# Altium PCB PCB3.PcbDoc
Units mil, origin at the board's own origin, x right, y up, seen from the top; angles counter-clockwise.
Board outline 2965.03 x 1980.03 mil, 4 copper layers (Top Layer, AGND1, AGND2, Bottom Layer), stack 23.756 mil thick; 79 components, 31 nets, 195 pads, 60 vias.
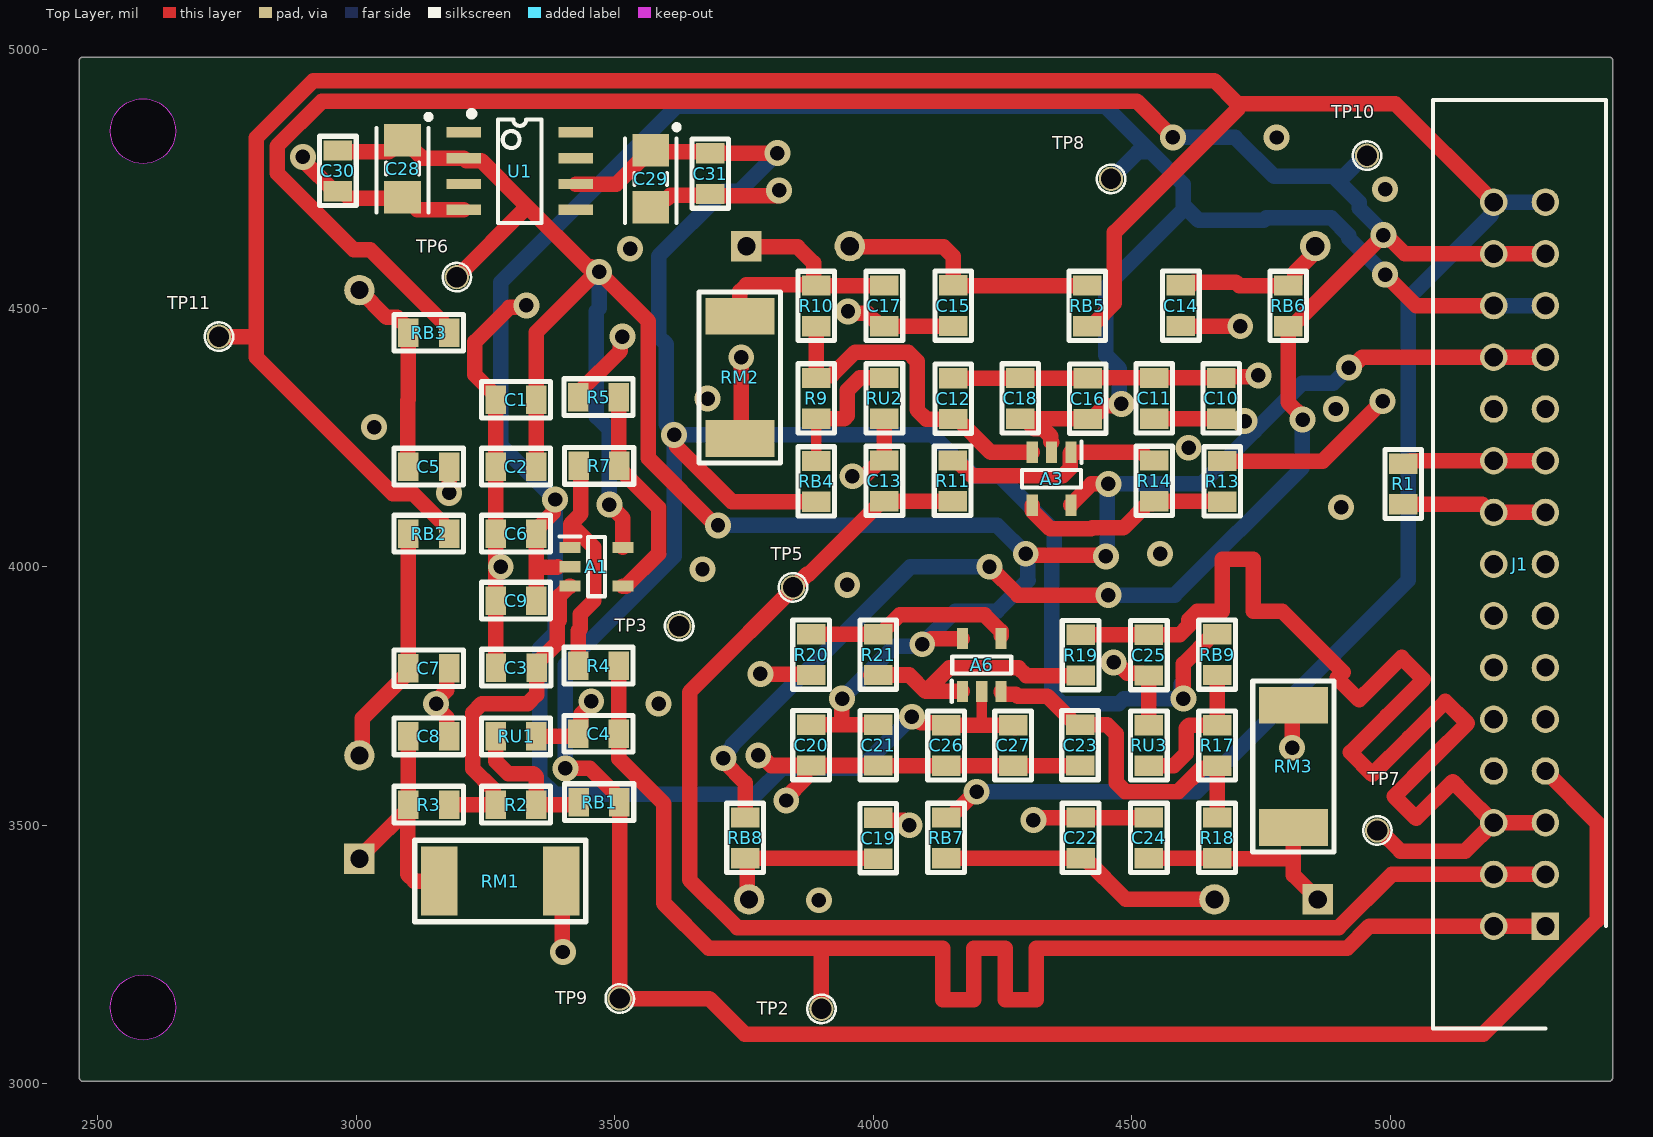
[diagram p0: Top Layer view]
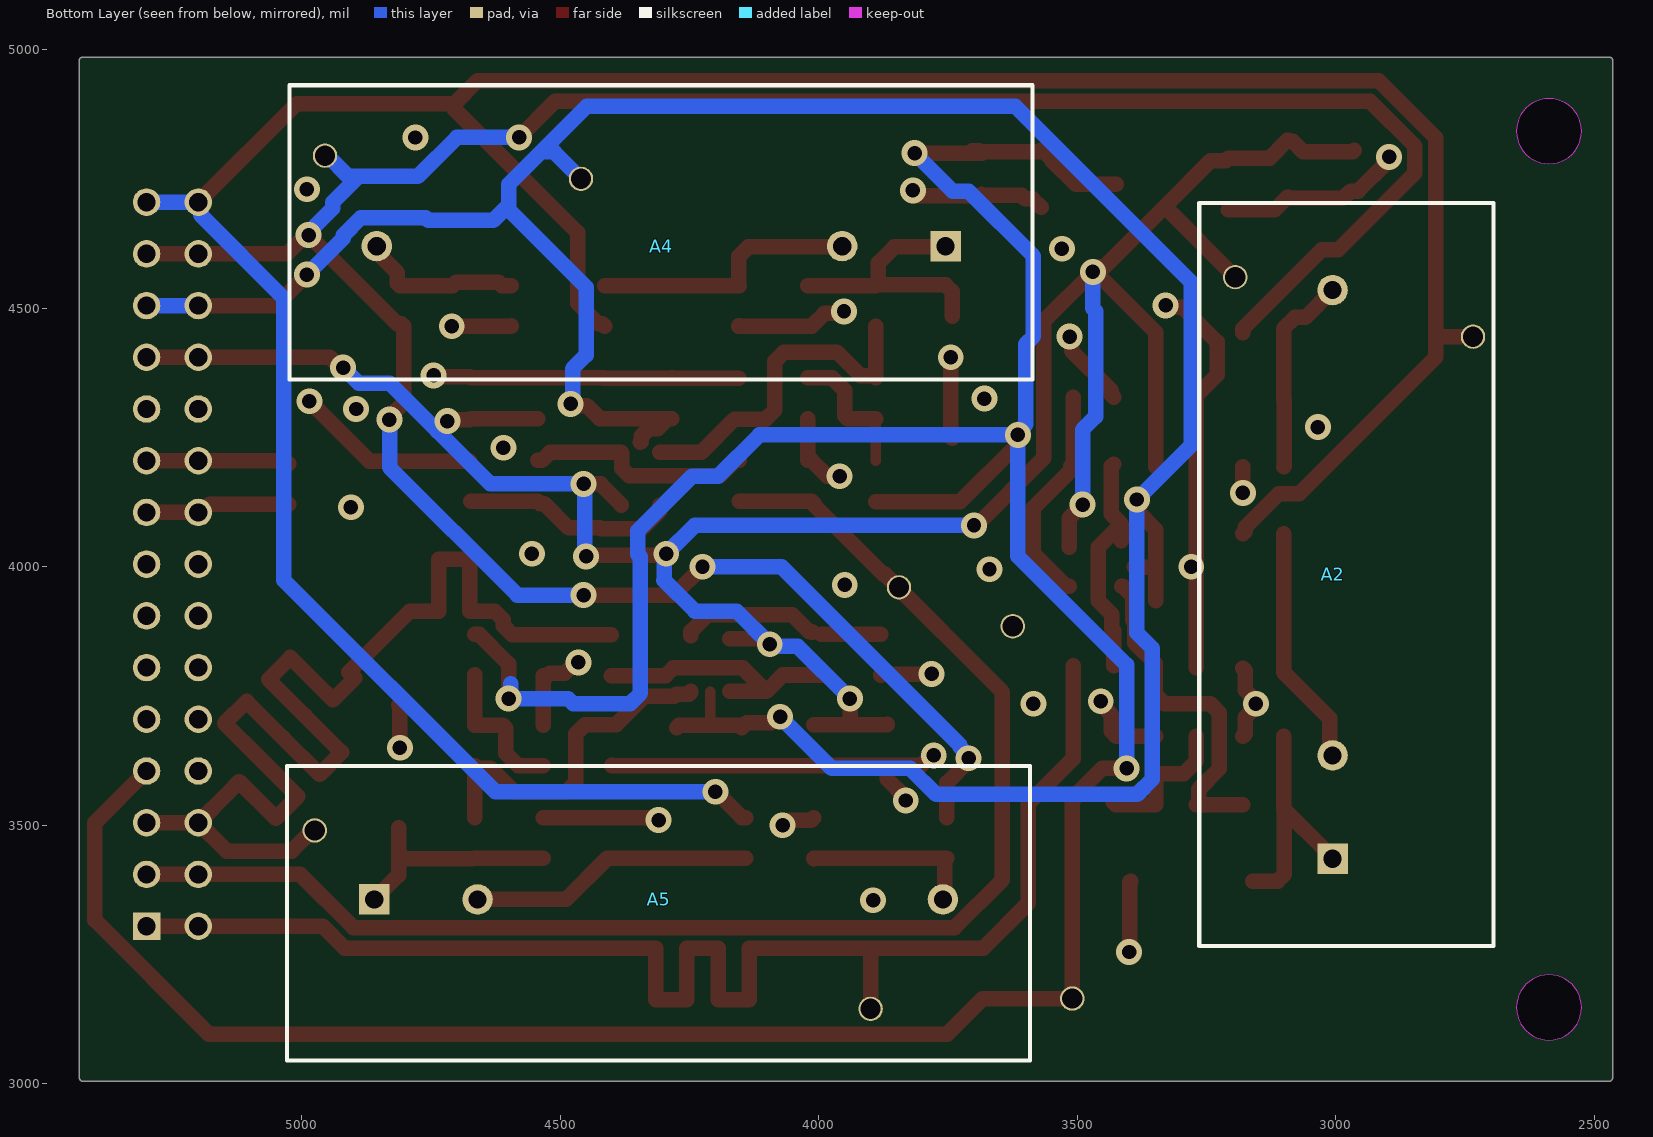
[diagram p1: Bottom Layer view, seen from below]
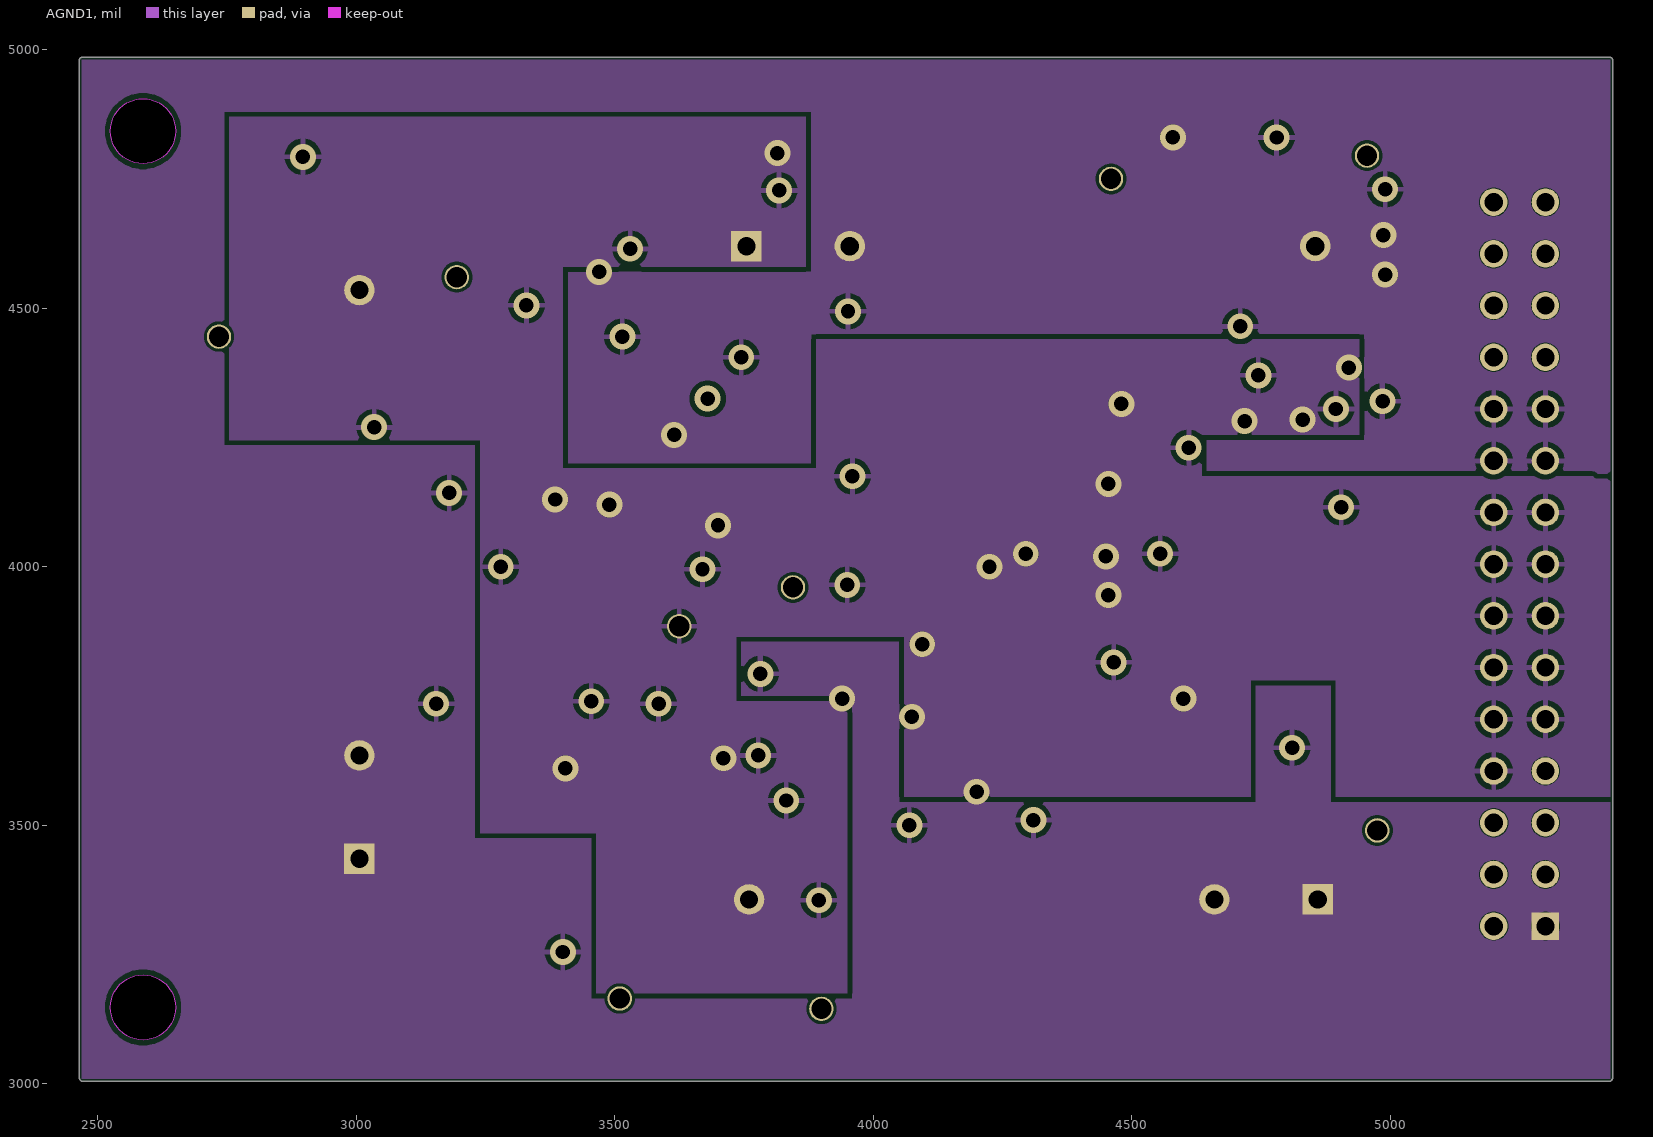
[diagram p2: AGND1]
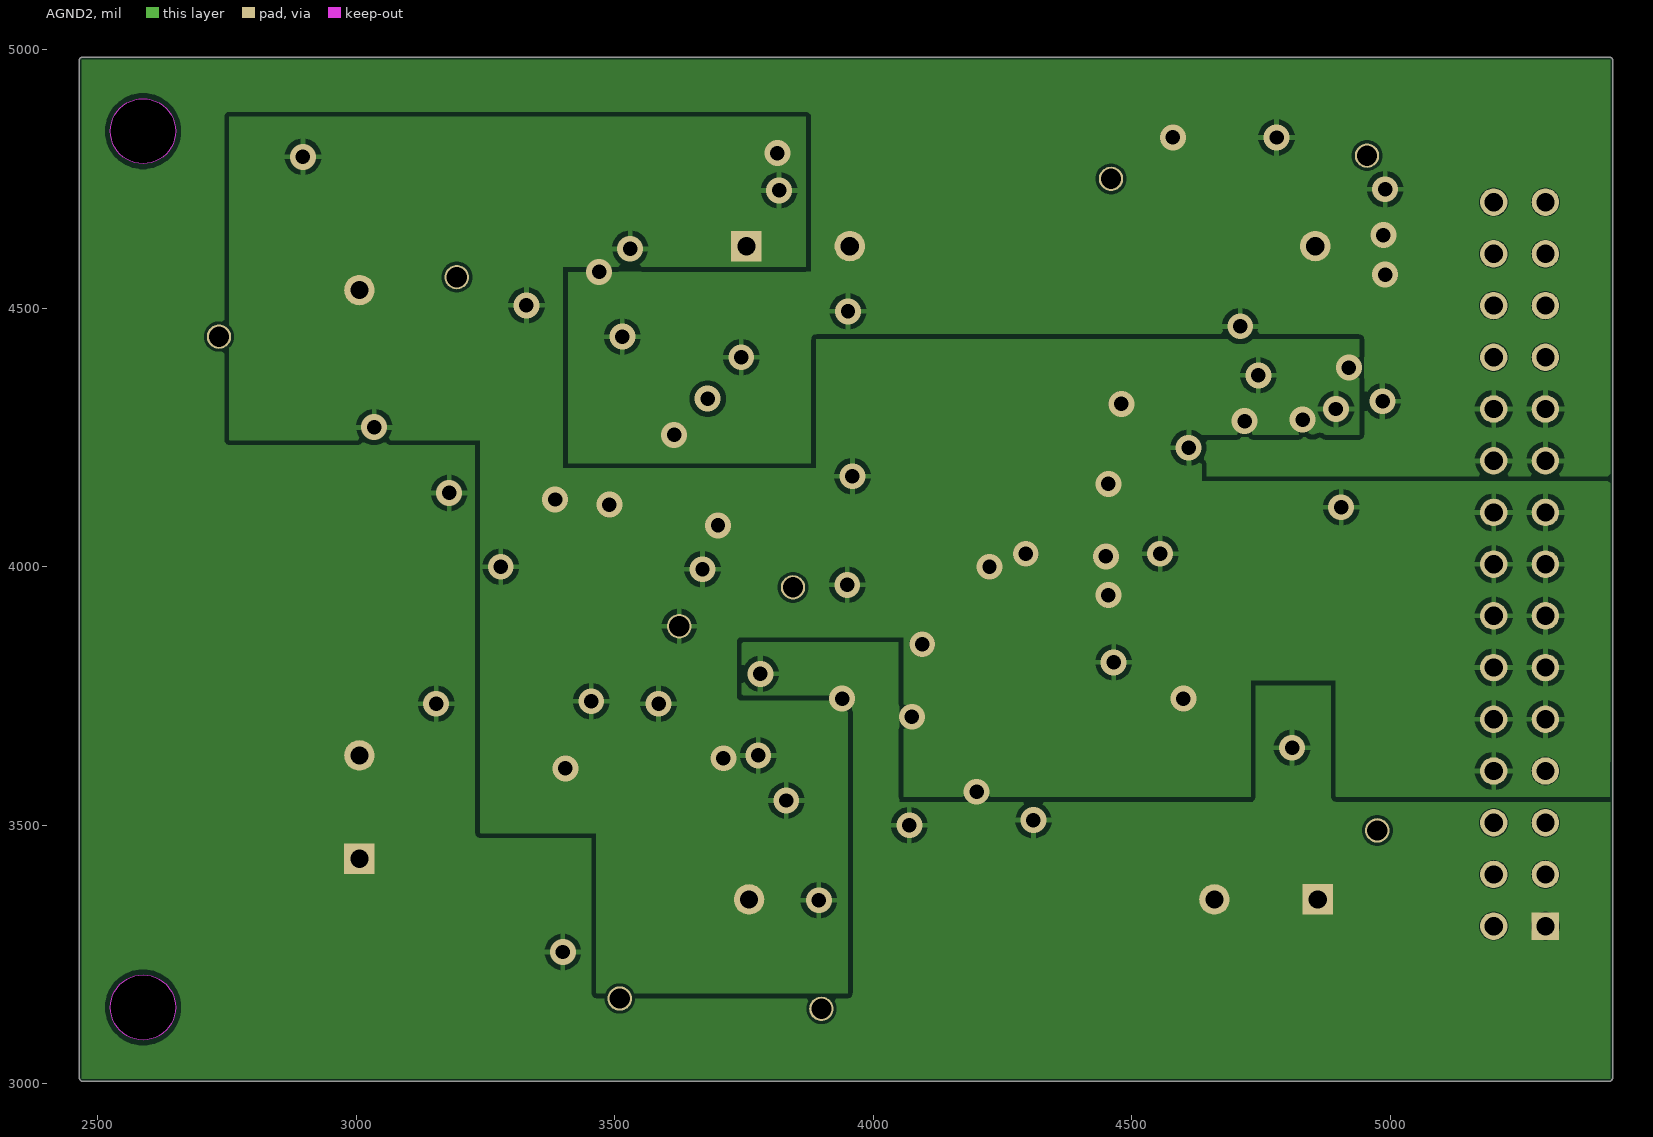
[diagram p3: AGND2]

## Layer stack, top to bottom
Top Solder: solder mask 0.4, Solder Resist, Dk 3.5
Top Layer: signal copper 1.4
Dielectric 2: prepreg 2.8, PP-006, Dk 4.1
AGND1: signal copper 1.378
Dielectric 1: dielectric 12.6, FR-4, Dk 4.8
AGND2: signal copper 1.378
Dielectric 3: prepreg 2.8, PP-006, Dk 4.1
Bottom Layer: signal copper 1.4
Bottom Solder: solder mask 0.4, Solder Resist, Dk 3.5

## Board outline
2467.14,3007.14 cw(c2470,3011.26) 2464.99,3011.26 2464.99,4980 cw(c2470,4980) 2470,4985.02 5422.76,4985.02 cw(c5422.76,4980) 5423.88,4984.89 cw(c5425,4980) 5430.02,4980 5430.02,3011.5 cw(c5425,3011.5) 5428.63,3008.04 cw(c5424.02,3010) 5424.02,3004.99 2471.26,3004.99 cw(c2471.26,3010)
cut-out: 2588.11,4779.21 cw(c2588.11,4842.2) 2525.12,4842.2 cw(c2588.11,4842.2) 2588.11,4905.2 cw(c2588.11,4842.2) 2651.1,4842.2 cw(c2588.11,4842.2)
cut-out: 2588.11,3084.8 cw(c2588.11,3147.8) 2525.12,3147.8 cw(c2588.11,3147.8) 2588.11,3210.79 cw(c2588.11,3147.8) 2651.1,3147.8 cw(c2588.11,3147.8)

## Design rules (kind name [scope] priority, off if disabled: settings)
Clearance [All] p1: gap=10 ignorepadtopadclearanceinfootprint=FALSE except(0: Arc-Hole Track-Hole SMDPad-Hole THPad-Hole Via-Hole Fill-Hole Poly-Hole Region-Hole Text-Hole)
MinimumSolderMaskSliver [All] p1: minsoldermaskwidth=1
PolygonConnect [All] p1: connectstyle=Relief reliefconductorwidth=10 reliefentries=4 polygonreliefangle="90 Angle" airgapwidth=10
RoutingVias [All] p1: holewidth=28 width=50 viastyle="Through Hole" minholewidth=28 minwidth=50 maxholewidth=28 maxwidth=50
SilkToSilkClearance [All] p1: silktosilkclearance=1
SilkToSolderMaskClearance [IsPad] p1: minsilkscreentomaskgap=1 clearancetoexposedcopper=TRUE
SolderMaskExpansion [All] p1: expansion=4 istentingtop=FALSE
Width [All] p1: maxlimit=100 minlimit=10 preferedwidth=10 midlayer1_maxwidth=10 midlayer2_maxwidth=10 minimp=50.000000 maximp=50.000000 favimp=50.000000
27 further rules are at their usual default settings.

## Components (designator, comment, footprint, x,y, rotation, side; value= is the part's Value field where it differs from the comment)
A1 "LTC6240HV" SOT95P280X100-5N 3465,4000 r0 top
A2 "LA55-P" XDCR_LA55-P 2980,3985 r90 bottom
A3 "LTC6240HV" SOT95P280X100-5N 4345,4170 r270 top
A4 "LA55-P" XDCR_LA55-P 4305,4646.57 r0 bottom
A5 "LA55-P" XDCR_LA55-P 4310,3330 r180 bottom
A6 "LTC6240HV" SOT95P280X100-5N 4210,3810 r90 top
C1 "105" 0805 3309.37,4323.02 r0 top value=101
C2 "103" 0805 3309.37,4193.52 r0 top value=101
C3 "101" 0805 3310,3805 r180 top
C4 "103" 0805 3468.92,3676.88 r0 top value=101
C5 "47nf" 0805 3140.63,4193.52 r180 top
C6 "103" 0805 3309.37,4064.01 r0 top value=101
C7 "47nf" 0805 3140.63,3803.75 r0 top
C8 "4.7uF" 0805 3140.63,3671.88 r0 top
C9 "105" 0805 3309.37,3934.51 r0 top value=101
C10 "105" 0805 4673.02,4325.63 r270 top value=101
C11 "103" 0805 4543.52,4325.63 r270 top value=101
C12 "101" 0805 4155,4325 r90 top
C13 "103" 0805 4021.88,4166.08 r270 top value=101
C14 "47nf" 0805 4595,4505 r90 top
C15 "47nf" 0805 4155,4505 r270 top
C16 "103" 0805 4415,4325 r270 top value=101
C17 "4.7uF" 0805 4021.88,4504.37 r270 top
C18 "105" 0805 4284.51,4325.63 r270 top value=101
C19 "47nf" 0805 4010,3475 r270 top
C20 "105" 0805 3880,3655 r90 top value=101
C21 "103" 0805 4010,3655 r90 top value=101
C22 "47nf" 0805 4401.25,3475.63 r90 top
C23 "101" 0805 4400,3655 r270 top
C24 "4.7uF" 0805 4533.12,3475.63 r90 top
C25 "103" 0805 4533.12,3828.92 r90 top value=101
C26 "103" 0805 4140.99,3654.37 r90 top value=101
C27 "105" 0805 4270.49,3654.37 r90 top value=101
C28 "106 25V" "1206 (钽电容)" 3090,4825 r270 top value=100pF
C29 "106 25V" "1206 (钽电容)" 3570,4805 r270 top value=100pF
C30 "104" 0805 2965,4765.63 r90 top
C31 "104" 0805 3685,4760 r90 top
J1 "HIF3FC-30PA-2.54DSA" SHDR30W50P254_2X15_4560X850X1200P 5300,3305 r90 top
R1 "DNP" 0805 5025,4160 r90 top
R2 "20k" 0805 3309.37,3540 r180 top value=10K
R3 "10k" 0805 3140.63,3540 r0 top value=10K
R4 "470R" 0805 3468.92,3808.75 r180 top
R5 "20k" 0805 3468.92,4328.02 r0 top value=10K
R7 "10k" 0805 3470,4195 r0 top value=10K
R9 "20k" 0805 3890,4325.63 r90 top value=10K
R10 "10k" 0805 3890,4504.37 r270 top value=10K
R11 "470R" 0805 4153.75,4166.08 r90 top
R13 "20k" 0805 4675,4165 r270 top value=10K
R14 "10k" 0805 4543.52,4166.08 r270 top value=10K
R17 "20k" 0805 4665,3654.37 r270 top value=10K
R18 "10k" 0805 4665,3475.63 r90 top value=10K
R19 "470R" 0805 4401.25,3828.92 r270 top
R20 "20k" 0805 3880,3830 r90 top value=10K
R21 "10k" 0805 4010,3830 r90 top value=10K
RB1 "0R" 0805 3470,3545 r180 top value=10K
RB2 "0R" 0805 3140.63,4064.01 r0 top value=10K
RB3 "0R" 0805 3140.63,4452.53 r180 top value=10K
RB4 "0R" 0805 3890,4165 r90 top value=10K
RB5 "0R" 0805 4414.01,4504.37 r270 top value=10K
RB6 "0R" 0805 4802.53,4504.37 r90 top value=10K
RB7 "0R" 0805 4140.99,3475.63 r90 top value=10K
RB8 "0R" 0805 3752.47,3475.63 r270 top value=10K
RB9 "0R" 0805 4665,3830 r270 top value=10K
RM1 "24R 1%精度" 2512 3275,3405 r0 top value=3.3K
RM2 "24R 1%精度" 2512 3755,4370 r270 top value=3.3K
RM3 "24R 1%精度" 2512 4800,3610 r90 top value=3.3K
RU1 "DNP" 0805 3309.37,3671.88 r0 top value=10K
RU2 "DNP" 0805 4021.88,4325.63 r270 top value=10K
RU3 "DNP" 0805 4533.12,3654.37 r90 top value=10K
TP2 "TP-黄色测试点" TESTPOINT-TH_BD1.0 3900,3145 r90 top
TP3 "TP-黄色测试点" TESTPOINT-TH_BD1.0 3625,3885 r90 top
TP5 "TP-黄色测试点" TESTPOINT-TH_BD1.0 3845,3960 r90 top
TP6 "TP-黄色测试点" TESTPOINT-TH_BD1.0 3195,4560 r90 top
TP7 "TP-黄色测试点" TESTPOINT-TH_BD1.0 4975,3490 r90 top
TP8 "TP-黄色测试点" TESTPOINT-TH_BD1.0 4460,4750 r90 top
TP9 "TP-黄色测试点" TESTPOINT-TH_BD1.0 3510,3165 r90 top
TP10 "TP-黄色测试点" TESTPOINT-TH_BD1.0 4955,4795 r90 top
TP11 "TP-黄色测试点" TESTPOINT-TH_BD1.0 2735,4445 r90 top
U1 "ADR423ARZ" SOIC-8 3208.46,4840 r0 top value=Value

## Footprints (in the part's own frame and the unit in brackets; to place one, negate y for a bottom-side part, rotate by r counter-clockwise, add the part's x,y. Pads: shape width x height; smd on the part's side, far side on the other; paste and mask are expansions set on the pad)
0805 [mm]
  rect 1x1.4 smd: 1(-1,0) 2(1,0)
  silkscreen extent -1.7,-0.9 1.7,0.9
"1206 (钽电容)" [mm]
  rect 1.6x1.8 smd: 1(0,0) 2(2.8,0)
  silkscreen extent -1.27,-1.27 3.56,1.4
2512 [mm]
  rect 1.8x3.4 smd: 1(-2.903,-0.324) 2(3.097,-0.324)
  silkscreen extent -4.1,-2.32 4.3,1.68
SHDR30W50P254_2X15_4560X850X1200P [mm]
  rect 1.35x1.35 hole 0.9: 1(0,0)
  round 1.35 hole 0.9: 2(0,2.54) 3(2.54,0) 4(2.54,2.54) 5(5.08,0) 6(5.08,2.54) 7(7.62,0) 8(7.62,2.54) 9(10.16,0) 10(10.16,2.54) 11(12.7,0) 12(12.7,2.54) 13(15.24,0) 14(15.24,2.54) 15(17.78,0) 16(17.78,2.54) 17(20.32,0) 18(20.32,2.54) 19(22.86,0) 20(22.86,2.54) 21(25.4,0) 22(25.4,2.54) 23(27.94,0) 24(27.94,2.54) 25(30.48,0) 26(30.48,2.54) 27(33.02,0) 28(33.02,2.54) 29(35.56,0) 30(35.56,2.54)
  silkscreen extent -5.02,-2.98 40.58,5.52, body extent -5.02,-2.98 40.58,5.52, height 12
SOIC-8 [mm]
  rect 1.7x0.51 smd: 1(0,0) 2(0,-1.27) 3(0,-2.54) 4(0,-3.81) 5(5.5,-3.81) 6(5.5,-2.54) 7(5.5,-1.27) 8(5.5,0)
  silkscreen extent 0.35,-4.44 3.82,0.94
SOT95P280X100-5N [mm]
  rect 1.05x0.55 smd: 1(-1.3,0.95) 2(-1.3,0) 3(-1.3,-0.95) 4(1.3,-0.95) 5(1.3,0.95)
  silkscreen extent -1.83,-1.45 0.43,1.48, body extent -1.4,-1.45 1.4,1.45, height 1
TESTPOINT-TH_BD1.0 [mm]
  round 1.2 hole 1 paste+0 mask+0.05: 1(0,0)
  silkscreen extent -0.7,-0.7 0.7,0.7
XDCR_LA55-P [mm]
  rect 1.5x1.5 hole 0.9: 1(-13.97,0.675)
  round 1.5 hole 0.9: 2(-8.89,0.675) 3(13.97,0.675)
  silkscreen extent -18.25,-7.22 18.25,7.22

## Part data
A1 A3 A6: library part AO_LTC6240HV, "OP AMP, +-5.5V, 18MHZ, 10V/US, 5TSOT23", Package=sot23-5, Classe=IC, Codice produttore=LTC6240HVHS5#PBF, Farnell #=2294747, Produttore="LINEAR TECHNOLOGY"
A2 A4 A5: "Current Sensor 50A 1 Channel Hall Effect, Closed Loop Bidirectional Module, Single Pass Through", Package="Module LEM USA", Availability=Unavailable, MF="LEM USA", MP="LA 55-P", Price=None, SnapEDA_Link=https://www.snapeda.com/parts/LA%2055-P/LEM%20USA%20Inc./view-part/38924/?ref=snap
C1 C2 C3 C4 C6 C9 C10 C11 C12 C13 C16 C18 C20 C21 C23 C25 C26 C27: library part Cap, "Capacitor", LatestRevisionDate=17-Jul-2002, LatestRevisionNote="Re-released for DXP Platform.", PackageReference=RAD-0.3, Published=8-Jun-2000, Publisher="Altium Limited"
C5 C7 C8 C14 C15 C17 C19 C22 C24 C30 C31: library part "Cap Semi", "Capacitor (Semiconductor SIM Model)", LatestRevisionDate=17-Jul-2002, LatestRevisionNote="Re-released for DXP Platform.", PackageReference=C1206, Published=8-Jun-2000, Publisher="Altium Limited"
  C30 C31: ClassName=Power
C28 C29: library part "Cap Pol3", "Polarized Capacitor (Surface Mount)", ClassName=Power, LatestRevisionDate=29-May-2009, LatestRevisionNote="IPC-7351 Footprint Added.", PackageDescription="Chip Capacitor", PackageReference=C0805, Published=8-Jun-2000, Publisher="Altium Limited"
J1: "Connector", Manufacturer_Name=Hirose, Manufacturer_Part_Number=HIF3FC-30PA-2.54DSA(71), Mouser Part Number=798-HIF3FC30PA254D71, Datasheet Link=https://datasheet.datasheetarchive.com/originals/distributors/SFDatasheet-7/sf-000141320.pdf, Height=12mm, Mouser Price/Stock=https://www.mouser.co.uk/ProductDetail/Hirose-Connector/HIF3FC-30PA-254DSA71?qs=eDUdFcBPps32%2FyAdBVx6ww%3D%3D
R1 R2 R3 R4 R5 R7 R9 R10 R11 R13 R14 R17 R18 R19 R20 R21 RB1 RB2 RB3 RB4 RB5 RB6 RB7 RB8 RB9 RM1 RM2 RM3 RU1 RU2 RU3: library part Res2, "Resistor", LatestRevisionDate=17-Jul-2002, LatestRevisionNote="Re-released for DXP Platform.", PackageReference=AXIAL-0.4, Published=8-Jun-2000, Publisher="Altium Limited"
  RM1 RM2 RM3: PackageDescription="Axial Device, Thru-Hole; 2 Leads; 0.4 in Pin Spacing"
TP2 TP3 TP5 TP6 TP7 TP8 TP9 TP10 TP11: JLCPCB Part Class="Extended Part", Add into BOM=yes, Convert to PCB=yes, Datasheet=https://atta.szlcsc.comnull, Device=TP-黄色测试点, LCSC Part Name=TP-黄色测试点, Manufacturer Part=TP-黄色测试点, Name=TP-黄色测试点, Supplier=LCSC, Supplier Footprint=TESTPOINT-TH_BD-2P-P2.00, Supplier Part=C9900007422, Symbol=TP-黄色测试点
U1: "Imported", ClassName=Power, Manufacturer_Part_Number=ADR423ARZ, RefDes=Refdes, Type=Type, Vendor=Vendor

## Via types
v1: diameter 50, hole 28, Top Layer to Bottom Layer, 60 vias

## Nets (pads, with @x,y where several pads share a name; then routed paths per layer and width w, separated by ;. In a path a pad name is that pad's centre, name@x,y a point inside that pad or via, vN(x,y) a via of type N, cw(c..) or ccw(c..) an arc to the next point about the centre after c; other vN are vias at no path point)
12VGND: C5.1 C7.2 C8.2 C14.1 C15.2 C17.2 C19.1 C22.2 C24.2 J1.19 J1.20 J1.21 J1.22 R1.2 R5.1 R13.1 R20.1 RM1.2 RM2.2 RM3.2 | length 2091.7
  Top Layer w30: C8.2 3175.31,3676.56 3175.31,3709.27 3155,3729.59 3155,3740.41 3175.31,3760.73 3175.31,3799.06 C7.2 ; v1(3180,4142.6) C5.1 ; RM1.2 3398.46,3390.72 3398.46,3256.54 v1(3400,3255) ; R5.1 3434.24,4332.71 3434.24,4340.58 3511.17,4417.52 3511.17,4441.17 v1(3515,4445) ; RM2.2 3745,4250.83 v1(3745,4405) ; v1(3782.14,3792.86) 3783.26,3791.74 3878.89,3791.74 R20.1 ; v1(3951.37,4493.74) 3955.19,4489.91 3989.09,4489.91 4014,4465 C17.2 4022.19,4465.31 4154.69,4465.31 C15.2 ; C19.1 4014.69,3509.68 4060.32,3509.68 v1(4070,3500) ; v1(4310,3510) 4315.41,3510 4320.41,3515 C24.2 ; C14.1 4595.31,4465.31 4709.69,4465.31 v1(4710,4465) ; R13.1 4869.37,4204.37 v1(4985,4320) ; v1(4810,3650) 4810,3729.17 RM3.2 ; R1.2 5032.87,4199.37 5038.5,4205 J1.20 J1.19
  other v1: 3155,3735 4990,4730 4780,4830
+12: J1.27 J1.28 RB3.1 RB6.1 RB8.1 TP10.1 | length 5296.4
  Top Layer w30: RB3.1 3180,4460.4 3027.24,4613.16 2995.5,4613.16 2847.43,4761.23 2847.43,4813.28 2934.14,4900 4510,4900 v1(4579.64,4830.36) ; v1(3710.36,3629.64) 3710.36,3624.23 3752.47,3582.12 RB8.1 ; v1(4225,4000) 4280,3945 v1(4455,3945) ; v1(4830.36,4284.64) 4830.36,4290.06 4802.53,4317.88 RB6.1 4807.21,4469.69 4815.09,4469.69 v1(4986.58,4641.17) 4991.99,4641.17 5028.16,4605 J1.28 J1.27
  Bottom Layer w30: v1(3710.36,3629.64) 3710.36,3635.06 3727.71,3652.41 3727.71,3655.71 4072,4000 v1(4225,4000) ; v1(4455,3945) 4582.9,3945 4830,4192.1 4830,4284.29 v1(4830.36,4284.64) ; v1(4579.64,4830.36) 4699.85,4830.36 4775.21,4755 4890,4755 ; TP10.1 4950.33,4795 4910.33,4755 4890,4755 ; v1(4986.58,4641.17) 4986.58,4646.59 4940.32,4692.84 4940.32,4704.68 4900.17,4744.83 4890,4755
-12: J1.29 J1.30 RB2.2 RB5.2 RB7.2 TP11.1 | length 6089.8
  Top Layer w30: TP11.1 2807.43,4445 ; RB2.2 3175.31,4068.7 3175.31,4076.57 3110.93,4140.96 3071.22,4140.96 2807.43,4404.75 2807.43,4445 ; RB7.2 4148.86,3515 4198.86,3565 v1(4200,3565) ; RB5.2 4418.7,4469.69 4426.57,4469.69 4466.57,4509.69 4466.57,4646.57 4705,4885 4705,4895 ; J1.30 5010,4895 4705,4895 ; 2807.43,4445 2807.43,4829.85 2917.57,4940 4660,4940 4705,4895
  Bottom Layer w30: v1(4200,3565) 4625.71,3565 5035,3974.29 5035,4520 5195.57,4680.57 5195.57,4700.57 J1.30 J1.29
A+5V: A1.5 A3.5 A6.5 C1.2 C2.2 C10.2 C11.2 C20.2 C21.2 C28.1 C30.2 J1.23 J1.24 TP6.1 U1.2 | length 5332
  Top Layer w30: C30.2 2967.67,4802.33 3063.39,4802.33 3083.39,4822.33 C28.1@3090,4822.33 ; C28.1@3092.53,4825 3093.94,4825 3110.43,4808.5 3110.43,4807.57 3128.01,4790 U1.2 3213.43,4785.04 3242.28,4785.04 3326.16,4701.16 ; TP6.1 3326.16,4691.16 3326.16,4701.16 ; C2.2 C1.2 3348.74,4453.74 v1@3465,4570 ; v1(3490,4120) 3516.18,4093.82 A1.5 ; v1(3700,4080) 3695,4080 3565,4210 3565,4475 v1(3470,4570) v1@3465,4570 ; C20.2@3867.44,3695 3868.07,3694.37 C20.2 3939.04,3694.37 ; v1(3940,3745) 3939.04,3744.04 3939.04,3694.37 ; C21.2 3939.04,3694.37 ; v1(4095,3850) 4100.41,3850 4111.59,3861.18 A6.5 ; v1(4295,4025) 4297.5,4022.5 4447.5,4022.5 v1(4450,4020) ; A3.5 4382.4,4120.31 4422.09,4160 v1(4455,4160) ; C11.2 C10.2 ; C10.2@4674.28,4285 4675.37,4283.92 4715.99,4283.92 v1(4718.33,4281.57) ; v1@4920,4379.59 v1(4920,4385) 4925.41,4385 4945.41,4405 J1.24 J1.23 J1.23@5303.24,4401.76 ; 3326.16,4701.16 3447.32,4580 3454.59,4580 3464.59,4570 v1@3465,4570
  Bottom Layer w30: v1(3470,4570) 3470,4499.44 3465,4494.44 3465,4290.21 3490,4265.21 v1(3490,4120) ; v1(3700,4080) 4240,4080 v1(4295,4025) 4298.83,4021.17 4298.83,3975.46 4300,3974.29 4239.77,3914.06 4159.06,3914.06 v1(4095,3850) 4091.17,3846.17 4041.17,3846.17 v1(3940,3745) ; v1(4450,4020) 4452.5,4022.5 4452.5,4157.5 v1(4455,4160) 4635,4160 4737.45,4262.45 ; v1(4718.33,4281.57) 4737.45,4262.45 ; v1(4920,4385) 4890,4355 4830,4355 4737.45,4262.45
A-5V: A1.2 A3.2 A6.2 C6.2 C9.2 C16.2 C18.2 C26.2 C27.2 J1.25 J1.26 TP8.1 | length 5518.6
  Top Layer w20: A6.2 4210,3695.76 4212.02,3693.74
  Top Layer w30: C9.2 3348.74,3999.26 ; v1(3385,4130) 3381.17,4126.17 3381.17,4104.32 3348.74,4071.89 3348.74,3999.26 ; 3390,4000 3389.26,3999.26 3348.74,3999.26 ; v1(4075,3710) 4080.41,3710 4091.99,3698.43 4139.49,3698.43 4148.86,3689.06 4153.55,3693.74 4212.02,3693.74 C27.2 C27.2@4275.18,3689.06 ; C18.2 C18.2@4292.38,4286.26 ; A3.2@4345,4240.35 4343.43,4241.92 4343.43,4252.21 4328.78,4266.85 4311.79,4266.85 C18.2@4292.38,4286.26 ; v1(4480,4315) 4476.17,4311.17 4448.42,4311.17 4423.5,4286.26 C18.2@4292.38,4286.26 ; v1(4990,4565) 5050,4505 J1.26
  Bottom Layer w30: v1(4075,3710) 3975,3610 3823.42,3610 3773.42,3560 3384.29,3560 3355,3589.29 3355,3841.94 3385,3871.94 v1(3385,4130) 3279.64,4235.36 3279.64,4549.64 3620,4890 4449.29,4890 4537.14,4802.14 ; TP8.1 4512.14,4802.14 4537.14,4802.14 ; v1(4480,4315) 4476.17,4318.83 4476.17,4383.12 4450,4409.29 4450,4540.71 4604.29,4695 ; v1@4980,4575 4919.53,4635.47 4919.53,4641.01 4886.01,4674.53 4759.91,4674.53 4755.39,4670 4629.29,4670 4600,4699.29 4600,4739.29 4537.14,4802.14 ; J1.26 J1.25
AGND: C1.1 C2.1 C3.2 C4.1 C6.1 C9.1 C10.1 C11.1 C12.2 C13.1 C16.1 C18.1 C20.1 C21.1 C23.2 C25.1 C26.1 C27.1 C28.2 C29.2 C30.1 C31.1 J1.8 J1.9 J1.10 J1.11 J1.12 J1.13 J1.14 J1.15 J1.16 J1.17 J1.18 R1.1 RU1.2 RU2.2 RU3.2 TP3.1 U1.4 | length 3473.2
  Top Layer w30: v1(2897.43,4792.57) 2901.25,4788.75 2901.25,4782.13 2957.13,4726.26 C30.1 ; C30.1@2971.47,4726.26 2976.15,4721.57 2977.56,4721.57 2987.04,4712.09 C28.2@3090,4712.09 ; C28.2@3092.53,4714.76 3093.94,4714.76 3118.7,4690 U1.4 ; C3.2 3270.32,3805.31 3270.32,3934.19 C9.1 C6.1 C2.1 3270,4330.9 3230,4370.9 3230,4434.92 3296.61,4501.53 3325.82,4501.53 v1(3329.64,4505.36) ; RU1.2 3424.87,3671.88 3429.55,3676.56 C4.1 3434.24,3681.56 3434.24,3713.82 3455,3734.59 v1(3455,3740) ; C29.2 3586.5,4711.26 3601.31,4711.26 3608.01,4717.96 3682.33,4717.96 C31.1 ; C31.1@3685,4719.22 3686.58,4717.64 v1@3818.06,4717.64 ; v1(3777.71,3635) 3783.12,3635 3802.49,3615.63 C20.1 3905.63,3615.63 C21.1 4010.31,3615.32 4140.67,3615.32 C26.1 C27.1 4270.81,3615.32 4399.69,3615.32 C23.2 ; v1(3832.06,3547.94) 3832.06,3553.35 3867.44,3588.73 3867.44,3610.94 C20.1@3886.75,3610.94 ; v1(3960,4175) 3983.55,4175 4014,4205.45 C13.1 RU2.2 ; C12.2 4283.88,4364.37 C18.1 4284.82,4364.69 4414.69,4364.69 C16.1 4415.63,4365 C11.1 C10.1 4675.52,4367.5 4742.5,4367.5 v1(4745,4370) ; v1(4465,3815) 4470.41,3815 4491.18,3794.24 4520.57,3794.24 4525.25,3789.55 C25.1 RU3.2 ; R1.1 5178.11,4120.63 5193.74,4105 J1.18 J1.17
  other v1: 3895,3355 3585,3735 3950,3965 3670,3995 3280,4000 4555,4025 4905,4115 4610,4230 3035,4270 4895,4305 3530,4615 3818.06,4727.64
CSO1: A2.1 C8.1 R3.1 RM1.1 | length 467.9
  Top Layer w30: A2.1 3021.1,3449.53 3021.1,3451.97 R3.1@3100,3530.87 ; C8.1 R3.1 3101.26,3532.13 R3.1@3100,3530.87 ; RM1.1 3112.74,3392.26 3100,3405 R3.1@3100,3530.87
CSO2: A4.1 C17.1 R10.1 RM2.1 | length 505.4
  Top Layer w30: RM2.1 3742.26,4532.26 3755,4545 R10.1@3883.74,4545 ; A4.1@3765,4618.43 3854,4618.43 3885,4587.43 3885,4548.43 3889.69,4543.74 R10.1 C17.1
CSO3: A5.1 C24.1 R18.1 RM3.1 | length 446.2
  Top Layer w10: R18.1 R18.1@4671.26,3430
  Top Layer w30: C24.1 R18.1 ; R18.1@4671.26,3435 4800,3435 4812.74,3447.74 ; RM3.1 4812.74,3447.74 ; A5.1 4812.74,3403.83 4812.74,3447.74
NetA1_1: A1.1 R4.2 R7.1 | length 463.6
  Top Layer w30: 3415,4050 3415,4082.5 ; R4.2 3429.55,3876.15 3433.43,3880.02 3433.43,3907.81 3459.49,3933.87 3459.49,4038.01 3415,4082.5 ; R7.1@3429.55,4198.52 3434.24,4193.83 3434.24,4151.47 3435,4150.71 3435,4102.5 3415,4082.5
NetA1_3: A1.3 C3.1 R2.2 R3.2 | length 662.1
  Top Layer w30: R3.2 R2.2 3265.31,3544.69 3265.31,3569.69 3225.31,3609.69 3225.31,3717.43 3242.89,3735 3331.8,3735 3349.37,3752.57 C3.1 3349.37,3812.87 3389.55,3853.05 3389.55,3892.72 3393.43,3896.59 3393.43,3943.7 3412.32,3962.6 A1.3
NetA1_4: A1.4 R5.2 R7.2 | length 429.4
  Top Layer w30: R5.2 3508.29,4198.52 3512.98,4193.83 3512.98,4185.96 3585,4113.93 3585,4025.17 3522.43,3962.6 A1.4
NetA2_2: A2.2 C7.1 RB2.1 | length 468.2
  Top Layer w30: A2.2 3012.13,3640.56 3012.13,3706.75 3101.26,3795.88 C7.1 3101.26,3934.51 RB2.1
NetA2_3: A2.3 C5.2 RB3.2 | length 393.5
  Top Layer w30: A2.3 3059.27,4482.3 3079.36,4482.3 3101.26,4460.4 RB3.2 3101.26,4323.02 3100,4321.76 3100,4194.78 C5.2
NetA3_1: A3.1 R11.2 R14.1 | length 445.5
  Top Layer w10: R14.1@4543.07,4205 R14.1
  Top Layer w30: R11.2 4161.62,4205.45 4191.56,4175.51 4366.18,4175.51 4380.83,4190.16 4380.83,4219.61 A3.1 4519.91,4221.18 4535.64,4205.45 R14.1
NetA3_3: A3.3 C12.1 R9.2 R10.2 | length 673.8
  Top Layer w30: R10.2 R9.2 3894.69,4369.69 3919.69,4369.69 3965,4415 4067.43,4415 4085,4397.43 4085,4303.2 4102.57,4285.63 C12.1 4162.87,4285.63 4227.32,4221.18 A3.3
NetA3_4: A3.4 R13.2 R14.2 | length 412.8
  Top Layer w30: A3.4 4307.6,4108.11 4342.56,4073.15 4421.65,4073.15 4423.5,4075 4483.93,4075 4530.96,4122.02 4538.83,4122.02 R14.2 R13.2@4673.02,4126.71
NetA4_2: A4.2 C15.1 RB5.1 | length 513.5
  Top Layer w30: A4.2@3965,4618.43 4136.57,4618.43 4155,4600 C15.1 ; C15.1@4153.75,4543.74 4284.51,4543.74 RB5.1
NetA4_3: A4.3 C14.2 RB6.2 | length 317.9
  Top Layer w30: C14.2@4595,4543.74 4613.03,4543.74 4619.29,4550 4701.5,4550 4707.76,4543.74 RB6.2 4810.4,4543.74 4815.09,4548.43 4815.09,4568.51 A4.3@4865,4618.43
NetA5_2: A5.2 C22.1 RB7.1 | length 552
  Top Layer w30: RB7.1 4270.49,3436.26 C22.1 4409.12,3436.26 4488.81,3356.57 A5.2
NetA5_3: A5.3 C19.2 RB8.2 | length 340.6
  Top Layer w30: A5.3 3756.24,3360.34 3756.24,3432.5 RB8.2 3881.98,3436.26 3882.29,3435.94 4009.68,3435.94 C19.2
NetA6_1: A6.1 R19.2 R21.1 | length 515.6
  Top Layer w30: R21.1@3995,3790.63 4069.74,3790.63 4101.56,3758.82 ; A6.1 4101.56,3758.82 ; R19.2 4296.22,3789.55 4281.29,3804.49 4147.22,3804.49 4101.56,3758.82
NetA6_3: A6.3 C23.1 R17.2 R18.2 | length 674.7
  Top Layer w30: A6.3 4247.4,3757.32 4251.57,3753.15 4276.06,3753.15 4279.65,3749.55 4336.94,3749.55 4392.13,3694.37 C23.1 4452.43,3694.37 4470,3676.8 4470,3582.57 4487.57,3565 4590,3565 4635.31,3610.31 4660.31,3610.31 R17.2 R18.2
NetA6_4: A6.4 R20.2 R21.2 | length 386.2
  Top Layer w30: R20.2 R21.2@3995,3869.37 ; R21.2@4011.48,3872.98 4012.56,3874.06 4018.34,3874.06 4051.14,3906.85 4215.4,3906.85 4247.4,3874.85 A6.4@4247.4,3866.85
NetR2_1: R2.1 RB1.2 RU1.1 | length 277.2
  Top Layer w30: RU1.1 3270,3624.14 3294.14,3600 3342.88,3600 3348.74,3594.14 R2.1 3425.94,3540 3430.63,3544.69 RB1.2
NetR9_1: R9.1 RB4.2 RU2.1 | length 274.9
  Top Layer w20: RB4.2 R9.1
  Top Layer w30: R9.1 3944.14,4286.26 3950,4292.12 3950,4340.86 3974.14,4365 RU2.1
NetR17_1: R17.1 RB9.2 RU3.1 | length 289.9
  Top Layer w30: RU3.1 4580.86,3615 4605,3639.14 4605,3687.88 4610.86,3693.74 R17.1 RB9.2
REF_3V: C29.1 C31.2 J1.7 RB1.1 RB4.1 RB9.1 TP9.1 U1.6 | length 6597
  Top Layer w30: v1@3415,3610 3452.24,3610 3509.37,3552.87 RB1.1 3509.68,3544.69 3509.68,3165.32 TP9.1 3683.09,3165 3751.71,3096.38 5179.88,3096.38 5400,3316.5 5400,3505 J1.7 ; U1.6 3503.46,4740 3549.57,4786.1 3549.57,4788.5 3566.06,4805 C29.1 3572.67,4802.33 C31.2@3682.04,4802.33 ; v1(3615,4255) 3618.83,4251.17 3618.83,4233.8 3727,4125.63 RB4.1 ; C31.2@3703.7,4804.06 3689.69,4804.06 C31.2 3814.37,4799.37 v1(3815,4800) ; v1@4600,3755 4600,3812.24 4657.13,3869.37 RB9.1
  Bottom Layer w30: v1(3405,3610) 3405,3810 3615,4020 v1(3615,4255) ; v1(3815,4800) 3740.94,4725.94 3710.23,4725.94 3585,4600.71 3585,4445.56 3600,4430.56 3600,4275.41 3615,4260.41 v1(3615,4255) ; 4596.17,3773.83 4596.17,3748.83 v1(4600,3745) 4484.79,3745 4474.79,3735 4365,3735 4345,3755 4345,4019.29 4350,4024.29 4350,4070 4245,4175 4195,4175 4115,4255 v1(3615,4255)
VSO1: C4.2 J1.1 J1.2 R4.1 TP2.1 | length 2769.4
  Top Layer w30: R4.1 C4.2 3508.29,3628.68 3595,3541.97 3595,3349.29 3682.24,3262.05 3900,3262.05 ; TP2.1 3900,3262.05 ; J1.1 J1.2 4959.4,3305 4916.45,3262.05 4475,3262.05 4315,3262.05 4315,3162.52 4255,3162.52 4255,3262.05 4195,3262.05 4195,3162.52 4135,3162.52 4135,3262.05 4075,3262.05 4045,3262.05 3900,3262.05
VSO2: C13.2 J1.3 J1.4 R11.1 TP5.1 | length 2769.4
  Top Layer w30: 3873.65,3986.35 3645,3757.71 3645,3394.46 3737.41,3302.05 4899.88,3302.05 5002.84,3405 J1.4 J1.3 ; 3875,3985 4009.32,4119.32 4009.32,4122.02 C13.2@4014,4126.71 ; C13.2 C13.2@4014,4126.71 ; R11.1 C13.2@4014,4126.71
VSO3: C25.2 J1.5 J1.6 R19.1 TP7.1 | length 2396.3
  Top Layer w30: R19.1 4401.47,3868.07 4401.7,3868.29 C25.2 4592.43,3868.29 4610,3885.86 4610,3896.97 4627.09,3914.06 4645,3914.06 4675,3914.06 4675,4014.06 4735,4014.06 4735,3914.06 4790.94,3914.06 4845,3860 4866.21,3838.79 4908.64,3796.36 4897.32,3785.04 4939.75,3742.62 4951.07,3753.93 5021.78,3824.64 5064.2,3782.22 4993.49,3711.51 4922.78,3640.8 4965.21,3598.37 5035.92,3669.08 5106.58,3739.74 5149,3697.31 5078.35,3626.65 5007.63,3555.94 5050.06,3513.52 5120.77,3584.23 5142.5,3562.5 J1.6 ; TP7.1 4979.67,3490 5019.67,3450 5145,3450 J1.6 ; J1.5 J1.6
  Bottom Layer w30: J1.6@5193.74,3505 J1.6
pads on no net: U1.1 U1.3 U1.5 U1.7 U1.8
copper on no net:
  other v1: 3680,4325

## Polygon pours and split planes (outlines as drawn)
12VGND on AGND1 "12VGND_L02_P012" (solid, pour order 12): 2470,3010 5425,3010 5425,3545 4885,3545 4885,3770 4740,3770 4740,3545 4050,3545 4050,3855 3745,3855 3745,3750 3960,3750 3960,3165 3455,3165 3455,3475 3230,3475 3230,4235 2745,4235 2745,4880 3880,4880 3880,4570 3410,4570 3410,4200 3880,4200 3880,4450 4950,4450 4950,4245 4645,4245 4645,4180 5420,4180 5425,4185 5425,4980 2470,4980
AGND on AGND1 "AGND_L02_P010" (solid, pour order 10): 3950,3175 3950,3740 3735,3740 3735,3865 4060,3865 4060,3555 4730,3555 4730,3780 4895,3780 4895,3555 5425,3555 5425,4170 5420,4175 4635,4175 4635,4255 4940,4255 4940,4440 3890,4440 3890,4190 3400,4190 3400,4580 3870,4580 3870,4870 2755,4870 2755,4245 3240,4245 3240,3485 3465,3485 3465,3175
12VGND on AGND2 "12VGND_L03_P011" (solid, pour order 11): 2470,3010 5425,3010 5425,3545 5420,3550 4890,3550 4890,3775 4740,3775 4735,3770 4735,3545 4050,3545 4050,3860 3755,3860 3745,3850 3745,3755 3755,3745 3960,3745 3960,3170 3460,3170 3460,3480 3235,3480 3235,4240 2750,4240 2750,4875 3880,4875 3880,4570 3405,4570 3405,4195 3885,4195 3885,4445 4950,4445 4950,4250 4640,4250 4640,4170 5415,4170 5425,4180 5425,4980 2470,4980 2470,3960
AGND on AGND2 "AGND_L03_P008" (solid, pour order 8): 3736,3750 3736,3855 cw(c3745,3855) 3745,3864 4059,3864 4059,3555 4730,3555 4730,3780 4895,3780 4895,3555 5424.76,3555 5425,3690 5425,4170 5420,4165 4635,4165 4635,4255 4940,4255 4940,4440 3890,4440 3890,4190 3400,4190 3400,4580 3870,4580 3870,4870 2755,4870 2755,4245 3240,4245 3240,3485 3465,3485 3465,3175 3951,3175 3951,3555 3951,3741 3745,3741 cw(c3745,3750)

## Silkscreen, mask and mechanical layers (free items; w line width, h text height)
Mechanical 1:
  lines w10: 2470,3011.26 2470,4980 5422.76,4980 ; 2471.26,3010 5424.02,3010 ; 5425,3011.5 5425,4980